# Altium PCB UARC_Sensor.PcbDoc (part 1 of 2)
Units mm, origin at the board's own origin, x right, y up, seen from the top; angles counter-clockwise.
Board outline 60.1 x 84.97 mm, 2 copper layers (Top Layer, Bottom Layer); 85 components, 78 nets, 396 pads, 103 vias.
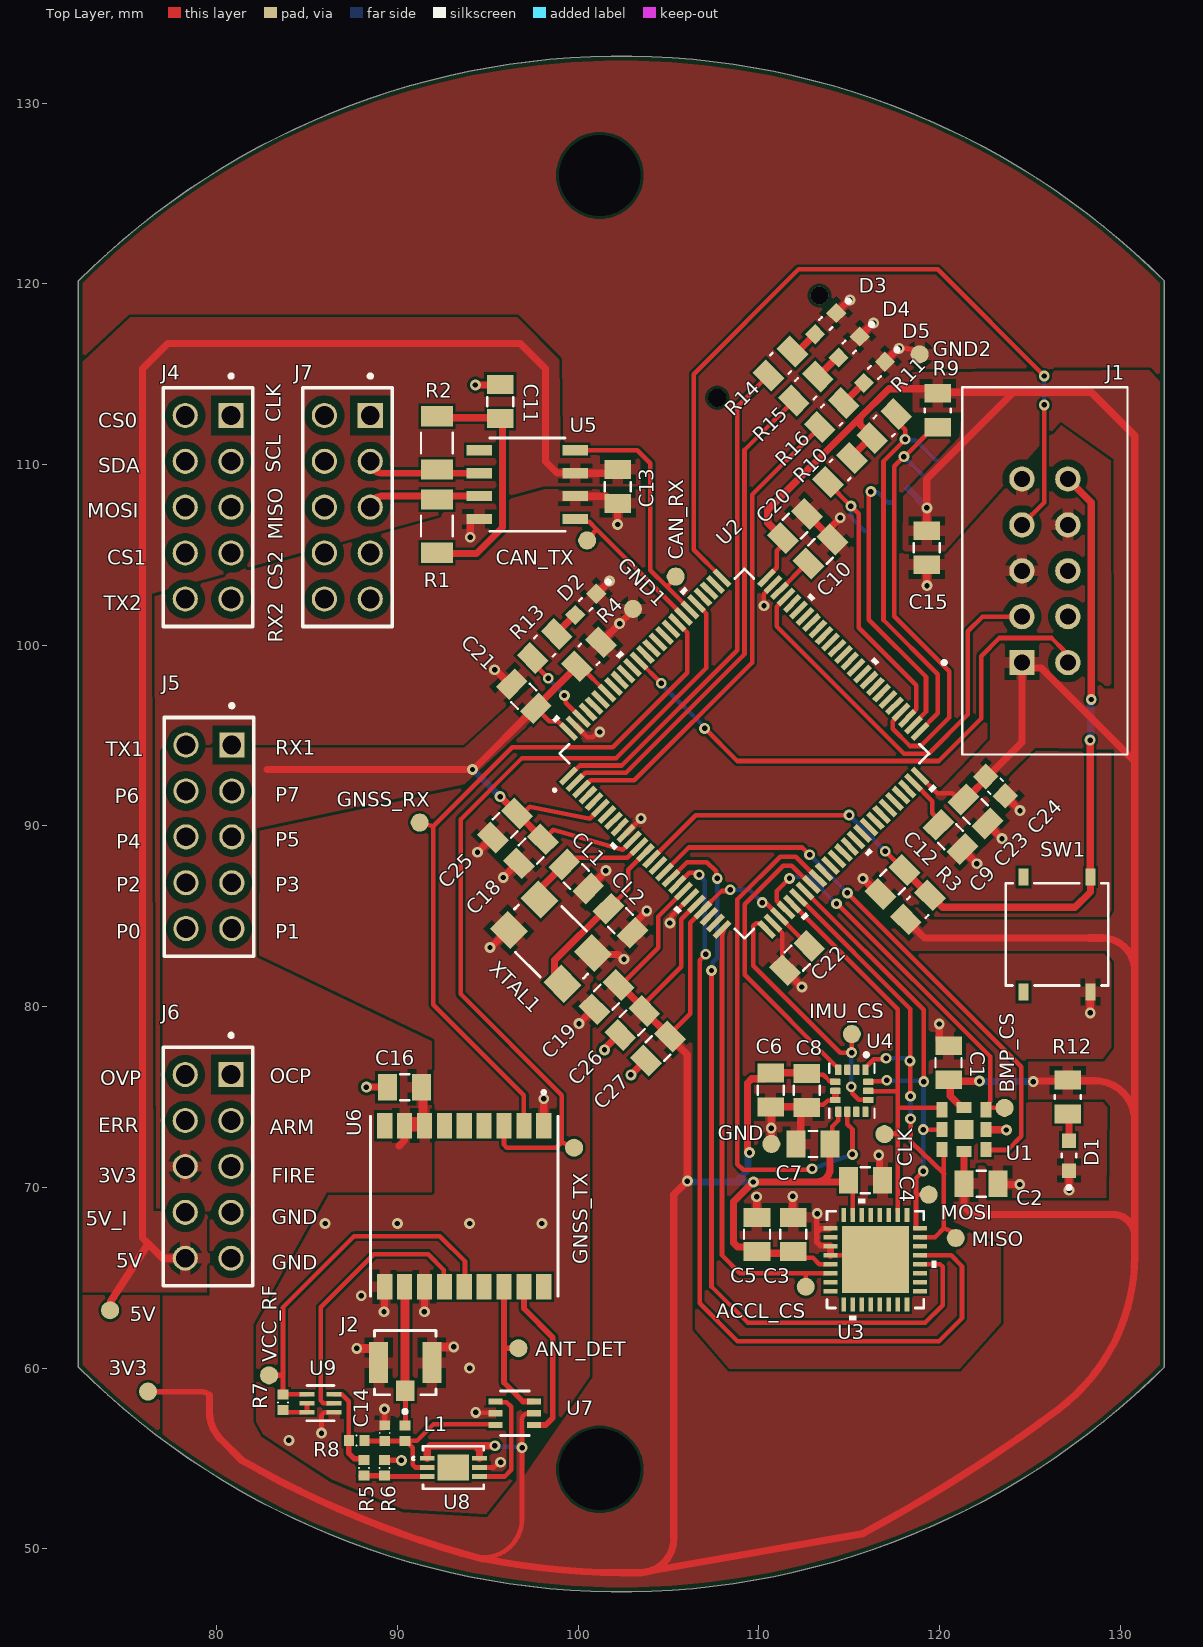
[diagram p0: Top Layer view]
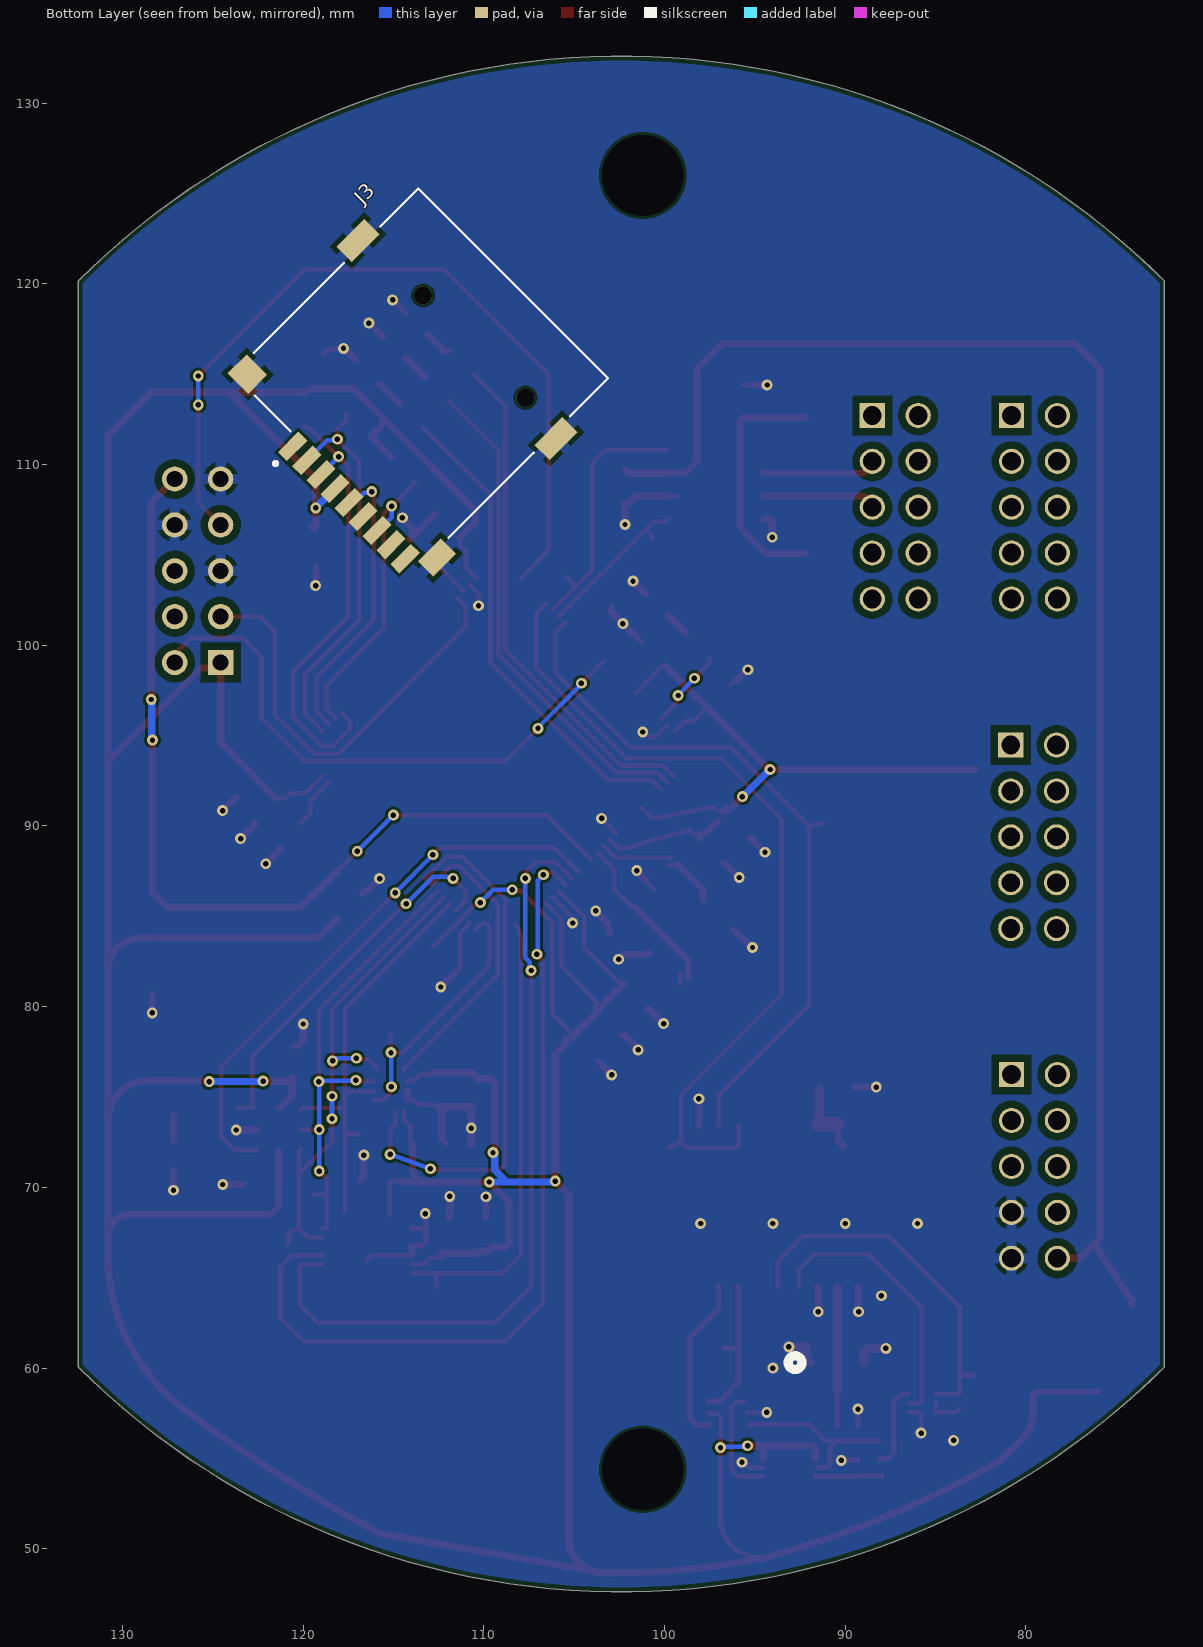
[diagram p1: Bottom Layer view, seen from below]
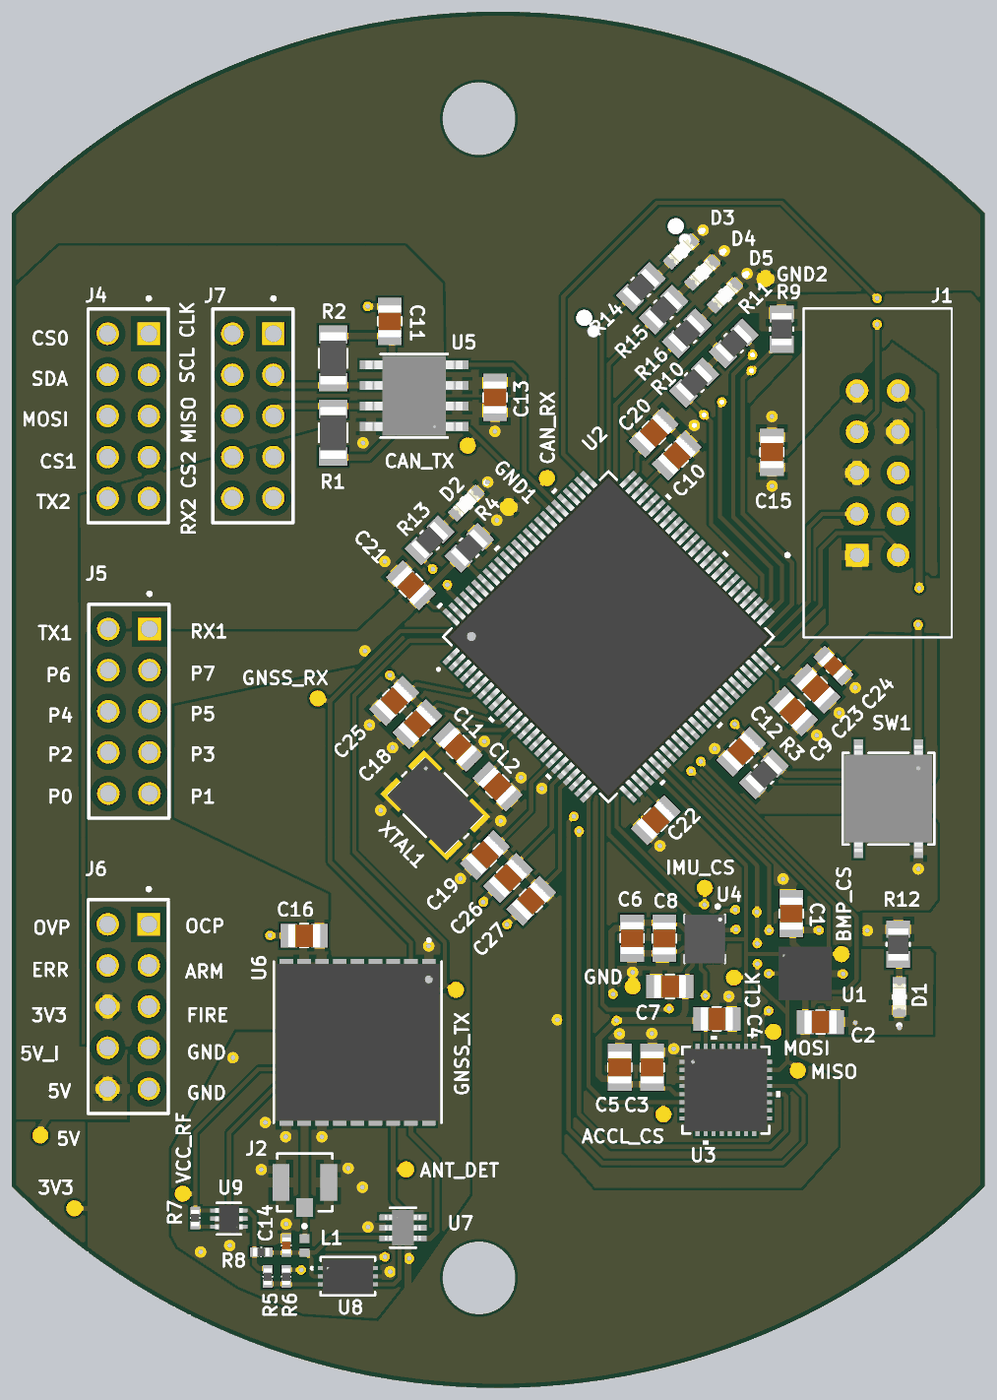
[diagram p2: 3D render of the assembled board from above, using the file's embedded part models]

## Layer stack, top to bottom
Top Solder: solder mask 0.0102, Solder Resist, Dk 3.5
Top Layer: signal copper 0.0356
Dielectric 1: dielectric 0.32, FR-4, Dk 4.8
Bottom Layer: signal copper 0.0356
Bottom Solder: solder mask 0.0102, Solder Resist, Dk 3.5

## Board outline
72.338,60.066 ccw(c102.391,90.118) 132.443,60.066 132.443,120.152 ccw(c102.39,90.1) 72.338,120.152

## Design rules (kind name [scope] priority, off if disabled: settings)
BoardOutlineClearance [All] p1: gap=0.254 ignorepadtopadclearanceinfootprint=FALSE except(0: Arc-SplitContinuation Track-SplitContinuation SMDPad-SplitContinuation THPad-SplitContinuation Via-SplitContinuation Fill-SplitContinuation Poly-SplitContinuation Region-SplitContinuation Text-SplitContinuation)
Clearance [All] p1: gap=0.152 ignorepadtopadclearanceinfootprint=FALSE except(0.4: THPad-Fill THPad-Poly THPad-Region)
HoleSize [All] p1: absolutevalues=TRUE maxlimit=6.2 minlimit=0.3 maxpercent=80.000 minpercent=20.000
MinimumAnnularRing [All] p1: minimumring=0.15
MinimumSolderMaskSliver [All] p1: minsoldermaskwidth=0.1
PolygonConnect ViaConnect [IsVia] p1: connectstyle=Direct reliefconductorwidth=0.254 reliefentries=4 polygonreliefangle="90 Angle" airgapwidth=0.254
PolygonConnect [All] p2: connectstyle=Relief reliefconductorwidth=0.6 reliefentries=4 polygonreliefangle="90 Angle" airgapwidth=0.254
RoutingVias [All] p1: holewidth=0.3 width=0.6 viastyle="Through Hole" minholewidth=0.3 minwidth=0.5 maxholewidth=1 maxwidth=5
SilkToSilkClearance [All] p1: silktosilkclearance=0.1
SilkToSolderMaskClearance [IsPad] p1: minsilkscreentomaskgap=0.1 clearancetoexposedcopper=TRUE
SolderMaskExpansion [All] p1: expansion=0.051 istentingtop=FALSE
Width [All] p1: maxlimit=25.4 minlimit=0.15 preferedwidth=0.3
26 further rules are at their usual default settings.

## Components (designator, comment, footprint, x,y, rotation, side; value= is the part's Value field where it differs from the comment)
3V3 "Test Point" "Test Point Pad Large" 76.2,58.7 r90 top
5V "Test Point" "Test Point Pad Large" 74.1,63.2 r0 top
ACCL_CS "Test Point" "Test Point Pad Large" 112.6,64.5 r90 top
ANT_DET "Test Point" "Test Point Pad Large" 96.7,61.1 r90 top (schematic designator GNSS_ANT_DETECT)
BMP_CS "Test Point" "Test Point Pad Large" 123.6,74.4 r90 top
C1 "100nF" CAPACITOR_0805_2012M-70N 120.5,76.9 r270 top
C2 "100nF" CAPACITOR_0805_2012M-70N 122.3,70.2 r0 top
C3 "100nF" CAPACITOR_0805_2012M-70N 111.9,67.4 r90 top
C4 "100nF" CAPACITOR_0805_2012M-70N 115.9,70.4 r0 top
C5 "10uF" CAPACITOR_0805_2012M-70N 109.9,67.4 r90 top
C6 "10nF" CAPACITOR_0805_2012M-70N 110.664,75.386 r270 top
C7 "100nF" CAPACITOR_0805_2012M-70N 113,72.4 r180 top
C8 "2.2uF" CAPACITOR_0805_2012M-70N 112.652,75.365 r270 top
C9 "2.2uF" CAPACITOR_0805_2012M-70N 120.6,89.4 r315 top
C10 "2.2uF" CAPACITOR_0805_2012M-70N 113.419,105.19 r45 top
C11 "4.7nF" CAPACITOR_0805_2012M-70N 95.69,113.484 r90 top
C12 "100nF" CAPACITOR_0805_2012M-70N 117.4,86.9 r225 top
C13 "100nF" CAPACITOR_0805_2012M-70N 102.19,108.784 r90 top
C14 "10nF" CAPACITOR_0402_1005M_55N 89.3,56.4 r270 top
C15 "100nF" CAPACITOR_0805_2012M-70N 119.3,105.4 r90 top
C16 "100nF" CAPACITOR_0805_2012M-70N 90.4,75.54 r0 top
C18 "100nF" CAPACITOR_0805_2012M-70N 97.4,88.6 r225 top
C19 "100nF" CAPACITOR_0805_2012M-70N 101.573,80.525 r225 top
C20 "100nF" CAPACITOR_0805_2012M-70N 112,106.6 r45 top
C21 "100nF" CAPACITOR_0805_2012M-70N 96.995,97.178 r135 top
C22 "100nF" CAPACITOR_0805_2012M-70N 112.124,82.684 r225 top
C23 "100nF" CAPACITOR_0805_2012M-70N 122,90.8 r315 top
C24 "4.7uF" CAPACITOR_0603_1608M_100N 123.1,92.2 r135 top
C25 "100nF" CAPACITOR_0805_2012M-70N 95.963,90.034 r225 top
C26 "1uF" CAPACITOR_0805_2012M-70N 103,79.1 r225 top
C27 "100nF" CAPACITOR_0805_2012M-70N 104.42,77.689 r225 top
CAN_RX "Test Point" "Test Point Pad Large" 105.4,103.8 r90 top
CAN_TX "Test Point" "Test Point Pad Large" 100.5,105.8 r90 top
CL1 "27pF" CAPACITOR_0805_2012M-70N 99.9,87.2 r315 top
CL2 "27pF" CAPACITOR_0805_2012M-70N 102.342,84.755 r315 top
CLK "Test Point" "Test Point Pad Large" 116.954,72.948 r90 top (schematic designator SPI_CLK)
D1 "SML-D12U1WT86" LED_SML-D12U1WT86 127.165,71.758 r90 top
D2 "SML-D12U1WT86" LED_SML-D12U1WT86 100.42,102.262 r225 top
D3 "SML-D12U1WT86" LED_SML-D12U1WT86 113.7,117.8 r225 top
D4 "SML-D12U1WT86" LED_SML-D12U1WT86 115,116.5 r225 top
D5 "SML-D12U1WT86" LED_SML-D12U1WT86 116.4,115.1 r225 top
GND "Test Point" "Test Point Pad Large" 110.696,72.404 r90 top
GND1 "Test Point" "Test Point Pad Large" 103.039,102.01 r90 top
GND2 "Test Point" "Test Point Pad Large" 118.9,116.1 r90 top
GNSS_RX "Test Point" "Test Point Pad Large" 91.236,90.19 r90 top
GNSS_TX "Test Point" "Test Point Pad Large" 99.776,72.194 r90 top
IMU_CS "Test Point" "Test Point Pad Large" 115.15,78.483 r90 top
J1 "103308-1" TE_103308-1 125.83,104.12 r90 top
J2 "RECE.20279.001E.01" CON3_RECE.20279.001E.01_TAL 90.438,60.303 r0 top
J3 "MSD-1-A" CUI_MSD-1-A 113.5,114.9 r45 bottom
J4 "SSW-105-02-G-D" SAMTEC_SSW-105-02-G-D 80.8,112.72 r90 top locked
J5 "SSW-105-02-G-D" SAMTEC_SSW-105-02-G-D 80.84,94.48 r90 top locked
J6 "SSW-105-02-G-D" SAMTEC_SSW-105-02-G-D 80.8,76.24 r90 top locked
J7 "SSW-105-02-G-D" SAMTEC_SSW-105-02-G-D 88.5,112.72 r90 top locked
L1 "27nH" INDC1005X55N 90.422,56.396 r90 top
MISO "Test Point" "Test Point Pad Large" 120.9,67.2 r90 top
MOSI "Test Point" "Test Point Pad Large" 119.4,69.6 r90 top
R1 "60" RESISTOR_1206_3216M_55N 92.19,106.597 r90 top
R2 "60" RESISTOR_1206_3216M_55N 92.19,111.195 r90 top
R3 "10k" Resistor_0805_2012M-50N 118.8,85.5 r225 top
R4 "10k" Resistor_0805_2012M-50N 100.6,99.5 r225 top
R5 "560" RESISTOR_0402_1005M_37N 88.151,54.482 r90 top
R6 "100k" RESISTOR_0402_1005M_37N 89.286,54.482 r270 top
R7 "100k" RESISTOR_0402_1005M_37N 83.667,58.107 r270 top
R8 "10" RESISTOR_0402_1005M_37N 87.749,55.998 r0 top
R9 "=Value" RESISTOR_0805_2012M-50N 119.9,113 r270 top
R10 "=Value" RESISTOR_0805_2012M-50N 114.5,109.7 r225 top
R11 "=Value" RESISTOR_0805_2012M-50N 116.94,112.129 r45 top
R12 "1k" Resistor_0805_2012M-50N 127.1,75 r90 top
R13 "1k" Resistor_0805_2012M-50N 98.154,99.957 r225 top
R14 "1k" Resistor_0805_2012M-50N 111.2,115.6 r225 top
R15 "1k" Resistor_0805_2012M-50N 112.6,114.2 r225 top
R16 "1k" Resistor_0805_2012M-50N 114.035,112.735 r225 top
SW1 "PTS526 SM15 SMTR2 LFS" "SON4_PTS526 SM15 SMTR2 LFS_CNK" 126.5,84 r270 top
U1 "BMP585" LGA9_BMP585_BOS 121.35,73.2 r0 top
U2 "STM32F407VGT7" LQFP100-14x14mm 109.2,94 r45 top
U3 "ADXL314WBCPZ-RL" LFCSP32_CP-32-17_ADI 116.45,66 r0 top
U4 "ICM-42370-P" PQFN50P250X300X81-14N 115.15,75.34 r270 top
U5 "MCP2557FD-H/SN" SOIC8_SN_MCH 97.19,108.884 r180 top
U6 "MAX-M10M-00B" MOD18_MAX-M10M_UBL 93.7,68.958 r270 top
U7 "NC7WZ07P6X" SC-88SC70-6SOT-363_419B-02_ONS 96.5,57.5 r0 top
U8 "LT6000CDCB#TRPBF" DFN-6_DCB_LIT 93.1,54.5 r0 top
U9 "SI1016X-T1-GE3" SOT_X-T1-GE3_VIS 85.748,58.059 r180 top
VCC_RF "Test Point" "Test Point Pad Large" 82.9,59.6 r90 top
XTAL1 "FY0800018" "4XTAL- 1-3XTAL 2-4NC_DIO" 98.5,83.6 r315 top

## Footprints (in the part's own frame and the unit in brackets; to place one, negate y for a bottom-side part, rotate by r counter-clockwise, add the part's x,y. Pads: shape width x height; smd on the part's side, far side on the other; paste and mask are expansions set on the pad)
"4XTAL- 1-3XTAL 2-4NC_DIO" [mm]
  rect 1.6x1.397 smd paste-0.699 mask+0: 1(-2.1,1.2) 2(2.1,1.2) 3(2.1,-1.2) 4(-2.1,-1.2)
  silkscreen extent -2.71,-1.8 2.71,1.8, body extent -2.58,-1.68 2.58,1.68, height 0.79
CAPACITOR_0402_1005M_55N [mm] "Capacitor, 0402 (1005 metric), 0.55mm height, nominal pads"
  rect 0.54x0.6 smd mask+0.051: 1(-0.432,0) 2(0.432,0)
  silkscreen extent -0.01,-0.28 0.01,0.28, body extent -0.5,-0.28 0.5,0.27, height 0.48
CAPACITOR_0603_1608M_100N [mm] "Capacitor, 0603 (1608 metric), 1mm high, nominal pads"
  rect 1x1.02 smd mask+0.051: 1(-0.759,0) 2(0.759,0)
  silkscreen extent -0.1,-0.5 0.1,0.5, body extent -0.8,-0.5 0.8,0.5, height 0.78
CAPACITOR_0805_2012M-70N [mm] "Capacitor, 0805 (2012 metric), 0.7mm high, nominal pads,"
  rect 1.04x1.47 smd mask+0.051: 1(-0.94,0) 2(0.94,0)
  silkscreen extent -0.25,-0.72 0.25,0.72, body extent -1,-0.73 1,0.73, height 1.23
CON3_RECE.20279.001E.01_TAL [mil]
  rect 41x45 smd paste+0 mask+0: 1(0,-61.02)
  rect 41x89 smd paste+0 mask+0: 2(58.07,0) 3(-58.07,0)
  silkscreen extent -67,-70 67,70
CUI_MSD-1-A [mm]
  rect 0.7x1.6 smd: 1(2.25,7.75) 2(1.15,7.75) 3(0.05,7.75) 4(-1.05,7.75) 5(-2.15,7.75) 6(-3.25,7.75) 7(-4.35,7.75) 8(-5.45,7.75) CD(-6.55,7.75)
  rect 1.2x1.8 smd: G1(-7.75,6.45)
  rect 1.6x1.5 smd: G2(6.85,6.7)
  rect 1.2x2.2 smd: G3(-7.75,-2.85) G4(7.75,-2.85)
  round 1 hole 1 unplated: ""(-4.95,-3.25) ""(3.05,-3.25)
  silkscreen extent -7.42,-7.25 7.42,9.2, body extent -8.28,-6.25 7.87,8.79, height 1.8
DFN-6_DCB_LIT [mil]
  rect 32x10 smd paste+0 mask+0: 1(-57,19.69) 2(-57,0) 3(-57,-19.68) 4(57,-19.68) 5(57,0) 6(57,19.69)
  rect 69x57 smd paste+0 mask+0: 7(0,0)
  silkscreen extent -90,-46 66,46, body extent -61,-41 61,41, height 32
INDC1005X55N [mm]
  rect 0.54x0.6 smd: 1(-0.432,0) 2(0.432,0)
  silkscreen extent 1.1,-0.1 1.3,0.1
LED_SML-D12U1WT86 [mm]
  rect 0.8x0.8 smd: A(0.825,0) C(-0.825,0)
  silkscreen extent -1.86,-0.4 0.11,0.4, body extent -0.8,-0.4 0.8,0.4, height 0.55
LFCSP32_CP-32-17_ADI [mil]
  rect 30x10 smd paste+0 mask+0: 1(-97.5,68.9) 2(-97.5,49.21) 3(-97.5,29.53) 4(-97.5,9.84) 5(-97.5,-9.84) 6(-97.5,-29.53) 7(-97.5,-49.21) 8(-97.5,-68.9) 17(97.5,-68.9) 18(97.5,-49.21) 19(97.5,-29.53) 20(97.5,-9.84) 21(97.5,9.84) 22(97.5,29.53) 23(97.5,49.21) 24(97.5,68.9)
  rect 10x30 smd paste+0 mask+0: 9(-68.9,-97.5) 10(-49.21,-97.5) 11(-29.53,-97.5) 12(-9.84,-97.5) 13(9.84,-97.5) 14(29.53,-97.5) 15(49.21,-97.5) 16(68.9,-97.5) 25(68.9,97.5) 26(49.21,97.5) 27(29.53,97.5) 28(9.84,97.5) 29(-9.84,97.5) 30(-29.53,97.5) 31(-49.21,97.5) 32(-68.9,97.5)
  rect 146x146 smd paste-73 mask+0: 33(0,0)
  silkscreen extent -106,-132 132,132, body extent -101,-101 101,101, height 61
LGA9_BMP585_BOS [mil]
  rect 24x33 smd paste+0 mask+0: 1(-48,43.31) 2(-48,0) 3(-48,-43.31) 5(48,-43.31) 6(48,0) 7(48,43.31)
  rect 33x24 smd paste+0 mask+0: 4(0,-48) 8(0,48)
  rect 42x42 smd paste+0 mask+0: 9(0,0)
  body extent -65,-65 65,65, height 77
LQFP100-14x14mm [mil]
  rect 47x12 smd paste+0 mask+0: 1(-305.12,236.22) 2(-305.12,216.54) 3(-305.12,196.85) 4(-305.12,177.17) 5(-305.12,157.48) 6(-305.12,137.8) 7(-305.12,118.11) 8(-305.12,98.43) 9(-305.12,78.74) 10(-305.12,59.06) 11(-305.12,39.37) 12(-305.12,19.69) 13(-305.12,0) 14(-305.12,-19.69) 15(-305.12,-39.37) 16(-305.12,-59.06) 17(-305.12,-78.74) 18(-305.12,-98.43) 19(-305.12,-118.11) 20(-305.12,-137.8) 21(-305.12,-157.48) 22(-305.12,-177.17) 23(-305.12,-196.85) 24(-305.12,-216.54) 25(-305.12,-236.22) 51(305.12,-236.22) 52(305.12,-216.54) 53(305.12,-196.85) 54(305.12,-177.17) 55(305.12,-157.48) 56(305.12,-137.8) 57(305.12,-118.11) 58(305.12,-98.43) 59(305.12,-78.74) 60(305.12,-59.06) 61(305.12,-39.37) 62(305.12,-19.69) 63(305.12,0) 64(305.12,19.69) 65(305.12,39.37) 66(305.12,59.06) 67(305.12,78.74) 68(305.12,98.43) 69(305.12,118.11) 70(305.12,137.8) 71(305.12,157.48) 72(305.12,177.17) 73(305.12,196.85) 74(305.12,216.54) 75(305.12,236.22)
  rect 12x47 smd paste+0 mask+0: 26(-236.22,-305.12) 27(-216.54,-305.12) 28(-196.85,-305.12) 29(-177.17,-305.12) 30(-157.48,-305.12) 31(-137.8,-305.12) 32(-118.11,-305.12) 33(-98.43,-305.12) 34(-78.74,-305.12) 35(-59.06,-305.12) 36(-39.37,-305.12) 37(-19.69,-305.12) 38(0,-305.12) 39(19.69,-305.12) 40(39.37,-305.12) 41(59.06,-305.12) 42(78.74,-305.12) 43(98.43,-305.12) 44(118.11,-305.12) 45(137.8,-305.12) 46(157.48,-305.12) 47(177.17,-305.12) 48(196.85,-305.12) 49(216.54,-305.12) 50(236.22,-305.12) 76(236.22,305.12) 77(216.54,305.12) 78(196.85,305.12) 79(177.17,305.12) 80(157.48,305.12) 81(137.8,305.12) 82(118.11,305.12) 83(98.43,305.12) 84(78.74,305.12) 85(59.06,305.12) 86(39.37,305.12) 87(19.69,305.12) 88(0,305.12) 89(-19.69,305.12) 90(-39.37,305.12) 91(-59.06,305.12) 92(-78.74,305.12) 93(-98.43,305.12) 94(-118.11,305.12) 95(-137.8,305.12) 96(-157.48,305.12) 97(-177.17,305.12) 98(-196.85,305.12) 99(-216.54,305.12) 100(-236.22,305.12)
  silkscreen extent -351,-349 349,349, body extent -315,-315 315,315, height 63
MOD18_MAX-M10M_UBL [mil]
  rect 55x33 smd paste+0 mask+0: 1(-175.5,173.23) 2(-175.5,129.92) 3(-175.5,86.61) 4(-175.5,43.31) 5(-175.5,0) 6(-175.5,-43.31) 7(-175.5,-86.61) 8(-175.5,-129.92) 9(-175.5,-173.23) 10(175.5,-173.23) 11(175.5,-129.92) 12(175.5,-86.61) 13(175.5,-43.31) 14(175.5,0) 15(175.5,43.31) 16(175.5,86.61) 17(175.5,129.92) 18(175.5,173.23)
  silkscreen extent -252,-204 196,204, body extent -191,-199 191,199, height 106
PQFN50P250X300X81-14N [mm]
  rrect14% 0.58x0.35 smd mask+0: 1(-1.16,0.75)
  rrect25% 0.58x0.35 smd mask+0: 2(-1.16,0.25) 3(-1.16,-0.25) 4(-1.16,-0.75) 8(1.16,-0.75) 9(1.16,-0.25) 10(1.16,0.25) 11(1.16,0.75)
  rrect25% 0.35x0.58 smd mask+0: 5(-0.5,-0.91) 6(0,-0.91) 7(0.5,-0.91) 12(0.5,0.91) 13(0,0.91) 14(-0.5,0.91)
  silkscreen extent -2.1,-1.25 1.5,1.25, body extent -1.5,-1.25 1.5,1.25, height 0.81
RESISTOR_0402_1005M_37N [mm] "Resistor, 0402 (1005 metric), 0.37mm height, nominal pads"
  rect 0.54x0.6 smd mask+0.051: 1(-0.432,0) 2(0.432,0)
  silkscreen extent -0.01,-0.28 0.01,0.28, body extent -0.5,-0.25 0.5,0.25, height 0.37
Resistor_0805_2012M-50N [mm] "Resistor, 0805 (2012 metric), nominal pads"
  rect 1.04x1.47 smd mask+0.051: 1(-0.94,0) 2(0.94,0)
  silkscreen extent -0.1,-0.72 0.1,0.72, body extent -1,-0.63 1,0.62, height 0.5
RESISTOR_0805_2012M-50N [mm] "Resistor, 0805 (2012 metric), nominal pads"
  rect 1.04x1.47 smd mask+0.051: 1(-0.94,0) 2(0.94,0)
  silkscreen extent -0.1,-0.72 0.1,0.72, body extent -1,-0.63 1,0.62, height 0.5
RESISTOR_1206_3216M_55N [mm]
  rect 1.13x1.77 smd mask+0.051: 1(-1.47,0) 2(1.47,0)
  silkscreen extent -0.58,-0.88 0.58,0.88, body extent -1.6,-0.8 1.6,0.8, height 0.65
SAMTEC_SSW-105-02-G-D [mm]
  rect 1.39x1.39 hole 1.04: 01(0,0)
  round 1.39 hole 1.04: 02(0,2.54) 03(-2.54,0) 04(-2.54,2.54) 05(-5.08,0) 06(-5.08,2.54) 07(-7.62,0) 08(-7.62,2.54) 09(-10.16,0) 10(-10.16,2.54)
  silkscreen extent -11.69,-1.21 2.27,3.75
SC-88SC70-6SOT-363_419B-02_ONS [mil]
  rect 31x14 smd paste+0 mask+0: 1(-42,25.59) 2(-42,0) 3(-42,-25.59) 4(42,-25.59) 5(42,0) 6(42,25.59)
  silkscreen extent -32,-48 32,48, body extent -44,-44 44,44, height 43
SOIC8_SN_MCH [mil]
  rect 55x22 smd paste+0 mask+0: 1(-104.5,75) 2(-104.5,25) 3(-104.5,-25) 4(-104.5,-75) 5(104.5,-75) 6(104.5,-25) 7(104.5,25) 8(104.5,75)
  silkscreen extent -82,-102 82,102, body extent -118,-96 118,96, height 69
"SON4_PTS526 SM15 SMTR2 LFS_CNK" [mm]
  rect 0.95x0.559 smd paste+0 mask+0: 1(-3.18,1.85) 2(-3.18,-1.85) 3(3.18,-1.85) 4(3.18,1.85)
  silkscreen extent -2.83,-2.83 2.83,2.83, body extent -3.3,-2.71 3.3,2.71, height 1.6
SOT_X-T1-GE3_VIS [mil]
  rect 32x10 smd paste+0 mask+0: 1(-29.5,19.69) 2(-29.5,0) 3(-29.5,-19.69) 4(29.5,-19.69) 5(29.5,0) 6(29.5,19.69)
  silkscreen extent -30,-39 30,39, body extent -34,-34 34,34, height 24
TE_103308-1 [mil]
  rect 55x55 hole 35: 1(-200,50)
  round 55 hole 35: 2(-100,50) 3(0,50) 4(100,50) 5(200,50) 6(-200,-50) 7(-100,-50) 8(0,-50) 9(100,-50) 10(200,-50)
  silkscreen extent -400,-180 400,223
"Test Point Pad Large" [mm] "Exposed copper pad, 1mm dia. Very easy to probe."
  round 1 smd paste-10 mask+0.051: 1(0,0)

## Part data
C1 C2 C3 C4 C7 C12 C15 C16 C18 C19 C20 C21 C22 C23 C25 C27: library part GRM21BR61E226ME44L, "CUSTOM: 885012207016 0.1µF 0805 ±10% 10V X7R Ceramic Capacitor", Capacitance at Rated Voltage=10%, Package=0805, Rated Voltage=25V, Supplier 1 Part No.=490-GRM155R61J224KE01JCT-ND, Temp Range="-55°C ~ 85°C", Temperature Coefficient=X5R, Tolerance=±20%, APSS Standard Part="APSS Standard", MF Part No.=GRM21BR61E226ME44L, Supplier 1=Digikey
C5: library part GRM21BR61E226ME44L, "CUSTOM: TACR106K010XTA 10µF 0805 ±10% 10V Tantalum Capacitor", Capacitance at Rated Voltage=10%, Package=0805, Rated Voltage=25V, Supplier 1 Part No.=490-GRM155R61J224KE01JCT-ND, Temp Range="-55°C ~ 85°C", Temperature Coefficient=X5R, Tolerance=±20%, APSS Standard Part="APSS Standard", MF Part No.=GRM21BR61E226ME44L, Supplier 1=Digikey
C6: library part GRM21BR61E226ME44L, "CUSTOM: 885012207011, 10000pF 0805 ±10% 10 X7R  Ceramic Capacitor", Capacitance at Rated Voltage=10%, Package=0805, Rated Voltage=25V, Supplier 1 Part No.=490-GRM155R61J224KE01JCT-ND, Temp Range="-55°C ~ 85°C", Temperature Coefficient=X5R, Tolerance=±20%, APSS Standard Part="APSS Standard", MF Part No.=GRM21BR61E226ME44L, Supplier 1=Digikey
C8 C9 C10: library part GRM21BR61E226ME44L, "CUSTOM: GRM21BR71A225KA01L 2.2µF 0805 ±10% 10V X7R Ceramic Capacitor", Capacitance at Rated Voltage=10%, Package=0805, Rated Voltage=25V, Supplier 1 Part No.=490-GRM155R61J224KE01JCT-ND, Temp Range="-55°C ~ 85°C", Temperature Coefficient=X5R, Tolerance=±20%, APSS Standard Part="APSS Standard", MF Part No.=GRM21BR61E226ME44L, Supplier 1=Digikey
C11: library part GRM21BR61E226ME44L, "CUSTOM: CC0805KRX7R9BB472 4700pF 0805 ±10% 50V X7R Ceramic Capacitor", Capacitance at Rated Voltage=10%, Package=0805, Rated Voltage=25V, Supplier 1 Part No.=490-GRM155R61J224KE01JCT-ND, Temp Range="-55°C ~ 85°C", Temperature Coefficient=X5R, Tolerance=±20%, APSS Standard Part="APSS Standard", MF Part No.=GRM21BR61E226ME44L, Supplier 1=Digikey
C13: library part GRM21BR60J107ME15L, "CUSTOM: 885012207016 0.1µF 0805 ±10% 10V X7R Ceramic Capacitor", Capacitance at Rated Voltage=20%, Package=0805, Rated Voltage=6.3V, Supplier 1 Part No.=490-GRM155R61E225KE11JCT-ND, Temp Range="-55°C ~ 85°C", Temperature Coefficient=X5R, Tolerance=±20%, APSS Standard Part="APSS Standard", MF Part No.=GRM21BR60J107ME15L, Supplier 1=Digikey
C14: library part GRM155R61E225KE11J, "CUSTOM: GRM155R71C103KA01D, 10000pF 0402 ±10% 16V X7R Ceramic Capacitor", Capacitance at Rated Voltage=10%, Package=0402, Rated Voltage=25V, Supplier 1 Part No.=490-10749-1-ND, Temp Range="-55°C ~ 85°C", Temperature Coefficient=X5R, Tolerance=±10%, APSS Standard Part="APSS Standard", MF Part No.=GRM155R61E225KE11J, Supplier 1=Digikey
C24: library part GRM188Z71A106KA73D, "CUSTOM:  GRM188Z71A475KE15D 4.7µF 0603 ±10% 10V X7R Ceramic Capacitor", Capacitance at Rated Voltage=20%, Package=0603, Rated Voltage=10V, Supplier 1 Part No.=490-5313-1-ND, Temp Range="-55°C ~ 125°C", Temperature Coefficient=X7R, Tolerance=±10%, APSS Standard Part="APSS Standard", MF Part No.=GRM188Z71A106KA73D, Supplier 1=Digikey
C26: library part GRM21BR61E226ME44L, "CUSTOM: 0805ZC105KAT2A 1µF 0805 ±10% 10V X7R  Ceramic Capacitor", Capacitance at Rated Voltage=10%, Package=0805, Rated Voltage=25V, Supplier 1 Part No.=490-GRM155R61J224KE01JCT-ND, Temp Range="-55°C ~ 85°C", Temperature Coefficient=X5R, Tolerance=±20%, APSS Standard Part="APSS Standard", MF Part No.=GRM21BR61E226ME44L, Supplier 1=Digikey
CL1 CL2: library part GRM21BR61E226ME44L, "CUSTOM: 600F270JT250XT4K 27pF 0805 ±5% 250V C0G, NP0 Ceramic Capacitor", Capacitance at Rated Voltage=10%, Package=0805, Rated Voltage=25V, Supplier 1 Part No.=490-GRM155R61J224KE01JCT-ND, Temp Range="-55°C ~ 85°C", Temperature Coefficient=X5R, Tolerance=±20%, APSS Standard Part="APSS Standard", MF Part No.=GRM21BR61E226ME44L, Supplier 1=Digikey
D1 D2 D3 D4 D5: "Red 620nm LED Indication - Discrete 2.2V 0603 (1608 Metric)", Package="0603 Rohm", Availability="In Stock", Check_prices=https://www.snapeda.com/parts/SML-D12U1WT86/Rohm/view-part/?ref=eda, MF=Rohm, MP=SML-D12U1WT86, Price=None, Purchase-URL=https://pricing.snapeda.com/search?q=SML-D12U1WT86&ref=eda, SnapEDA_Link=https://www.snapeda.com/parts/SML-D12U1WT86/Rohm/view-part/?ref=snap
J1: "Header;  Pin;  Vertical;  Copper Alloy;  Thermoplastic;  10;  0.100 x 0.100 in.;  1 A", Package=None, Availability=Unavailable, MF="TE Connectivity", MP=103308-1, Price=None, SnapEDA_Link=https://www.snapeda.com/parts/103308-1/TE%20Connectivity%20AMP%20Connectors/view-part/519501/?ref=snap
J2: "No Description Available", Manufacturer_Name="Taoglas Limited", Copyright="Copyright (C) 2025 Ultra Librarian. All rights reserved.", Digi-Key_Part_Number_1=931-1107-1-ND, Digi-Key_Part_Number_2=931-1107-6-ND, Digi-Key_Part_Number_3=931-1107-2-ND, Manufacturer_Part_Number=RECE.20279.001E.01, RefDes=RefDes, Type="Coaxial Connectors(RF) Assemblies"
J3: "Micro SD Card Connector, 9 Positions, Connector and Ejector, Push In, Auto Eject Out, Surface Mount, 1.8 mm Height Above Board, Gold Flash", Package=None, Check_prices=https://www.snapeda.com/parts/MSD-1-A/Same+Sky/view-part/?ref=eda, MF="Same Sky", MP=MSD-1-A, SnapEDA_Link=https://www.snapeda.com/parts/MSD-1-A/Same+Sky/view-part/?ref=snap
J4 J5 J6 J7: Package=None, Availability=Unavailable, MF="Samtec Inc.", MP=SSW-105-02-G-D, Price=None
L1: library part LQG15HH27NJ02D, "LQG15HN2N2S02D 27nH 0402  Unshielded Multilayer Inductor 350 mA 460mOhm Max", Package=None, Availability=Unavailable, MP=LQG15HH27NJ02D, Price=None
R1 R2: library part "TNPW1206xxxxDE Series", "CUSTOM: CRCW120660R0KNEAIF 60 Ohms 1206  ±10% 0.25W, 1/4W Chip Resistor,", Package=0805, Power=0.52W, Rated Voltage=200V, Temp Range="-55°C ~ 155°C", Temperature Coefficient=±200ppm/°C, Tolerance=0.5%, Value Range="1R ~ 2M", E Series=E24+E96, Supplier 1=Digikey
R3 R4: library part "RMCF0805JT Series", "CUSTOM: CRCW080510K0FKEA 10 kOhms 0805  ±1% 0.25W, 1/4W Chip Resistor", Package=0805, Power=1/8W, Rated Voltage=150V, Temp Range="-55°C ~ 155°C", Temperature Coefficient=±200ppm/°C, Tolerance=5%, Value Range="100m ~ 22M", APSS Standard Part="APSS Standard", E Series=E24, Supplier 1=Digikey
R5: library part "RMCF0402JT Series", "CUSTOM: ERJ-2GEJ561X 560 Ohms 0402  ±5% 0.1W, 1/10W Chip Resistor", Package=0402, Power=1/16W, Rated Voltage=50V, Temp Range="-55°C ~ 155°C", Temperature Coefficient=±100ppm/°C, Tolerance=5%, Value Range="1 ~ 20M", APSS Standard Part="APSS Standard", E Series=E24, Supplier 1=Digikey
R6 R7: library part "RMCF0402JT Series", "CUSTOM: RK73B1ETTP104J 100 kOhms 0402 ±5% 0.1W, 1/10W Chip Resistor", Package=0402, Power=1/16W, Rated Voltage=50V, Temp Range="-55°C ~ 155°C", Temperature Coefficient=±100ppm/°C, Tolerance=5%, Value Range="1 ~ 20M", APSS Standard Part="APSS Standard", E Series=E24, Supplier 1=Digikey
R8: library part "RMCF0402JT Series", "CUSTOM: SG73P1EWTTP100J 10 Ohms 0402 ±5% 0.25W, 1/4W Chip Resistor", Package=0402, Power=1/16W, Rated Voltage=50V, Temp Range="-55°C ~ 155°C", Temperature Coefficient=±100ppm/°C, Tolerance=5%, Value Range="1 ~ 20M", APSS Standard Part="APSS Standard", E Series=E24, Supplier 1=Digikey
R9 R10 R11: library part "Generic Resistor", "CUSTOM: CRCW080510K0FKEA 10 kOhms 0805  ±1% 0.25W, 1/4W Chip Resistor", Tolerance=?%
R12 R13 R14 R15 R16: library part "RMCF0805JT Series", "CUSTOM: CRCW08051K00FKEA 1 kOhms 0805 ±1% 0.25W, 1/4W Chip Resistor", Package=0805, Power=1/8W, Rated Voltage=150V, Temp Range="-55°C ~ 155°C", Temperature Coefficient=±200ppm/°C, Tolerance=5%, Value Range="100m ~ 22M", APSS Standard Part="APSS Standard", E Series=E24, Supplier 1=Digikey
SW1: "Description", Manufacturer_Name="C&K Components", Copyright="Copyright (C) 2025 Ultra Librarian. All rights reserved.", Manufacturer_Part_Number="PTS526 SM15 SMTR2 LFS", RefDes=RefDes, Type=Type
U1: "No Description Available", Manufacturer_Name="Bosch Sensortec", Copyright="Copyright (C) 2025 Ultra Librarian. All rights reserved.", Digi-Key_Part_Number_1=828-BMP585TR-ND, Digi-Key_Part_Number_2=828-BMP585CT-ND, Digi-Key_Part_Number_3=828-BMP585DKR-ND, Manufacturer_Part_Number=BMP585, RefDes=RefDes, Type="Pressure Sensors, Transducers"
U2: "High-performance foundation line, Arm Cortex-M4 core with DSP and FPU, 1 Mbyte of Flash memory, 168 MHz CPU, ART Accelerator, Ethernet, FSMC", Manufacturer_Name=STMicroelectronics, Copyright="Copyright (C) 2025 Ultra Librarian. All rights reserved.", Manufacturer_Part_Number=STM32F407VGT7, RefDes=RefDes, Type=Type
U3: "Â±200 g Range, 3-Axis Digital Accelerometer", Manufacturer_Name="Analog Devices Inc", Copyright="Copyright (C) 2025 Ultra Librarian. All rights reserved.", Manufacturer_Part_Number=ADXL314WBCPZ-RL, RefDes=RefDes, Type=Type
U4: "Accelerometer X, Y, Z Axis 2g, 4g, 8g, 16g 14-LGA (2.5x3)", Package=None, Check_prices=https://www.snapeda.com/parts/ICM-42370-P/InvenSense/view-part/?ref=eda, MF=InvenSense, MP=ICM-42370-P, SnapEDA_Link=https://www.snapeda.com/parts/ICM-42370-P/InvenSense/view-part/?ref=snap
U5: library part MCP2557FD-HSN, "No Description Available", Manufacturer_Name=Microchip, Copyright="Copyright (C) 2025 Ultra Librarian. All rights reserved.", Digi-Key_Part_Number_1=MCP2557FD-H/SN-ND, Manufacturer_Part_Number=MCP2557FD-H/SN, RefDes=RefDes, Type=Type
U6: "No Description Available", Manufacturer_Name=Ublox, Copyright="Copyright (C) 2025 Ultra Librarian. All rights reserved.", Digi-Key_Part_Number_1=672-MAX-M10M-00BTR-ND, Digi-Key_Part_Number_2=672-MAX-M10M-00BCT-ND, Digi-Key_Part_Number_3=672-MAX-M10M-00BDKR-ND, Manufacturer_Part_Number=MAX-M10M-00B, RefDes=RefDes, Type=RF
U7: "Description", Manufacturer_Name=onsemi, Copyright="Copyright (C) 2025 Ultra Librarian. All rights reserved.", Manufacturer_Part_Number=NC7WZ07P6X, RefDes=RefDes, Type=Type
U8: library part LT6000CDCBTRPBF, "Single 1.8V, 13ÂµA Precision Rail-to-Rail Op Amp", Manufacturer_Name="Analog Devices Inc", Copyright="Copyright (C) 2025 Ultra Librarian. All rights reserved.", Datasheet=https://www.analog.com/media/en/technical-documentation/data-sheets/600012fa.pdf, Digi-Key_Part_Number_1=505-LT6000CDCB#TRPBFCT-ND, Digi-Key_Part_Number_2=505-LT6000CDCB#TRPBFDKR-ND, Digi-Key_Part_Number_3=505-LT6000CDCB#TRPBFTR-ND, Digi-Key_Part_Number_4=LT6000CDCB#TRPBF-ND, Manufacturer_Part_Number=LT6000CDCB#TRPBF, RefDes=RefDes, Type=Type
U9: "COMPLEMENTARY N & P-CH 20-V (D-S) MOSFET", Manufacturer_Name=Vishay, Copyright="Copyright (C) 2025 Ultra Librarian. All rights reserved.", Datasheet=https://www.vishay.com/doc?71168, Digi-Key_Part_Number_1=SI1016X-T1-GE3TR-ND, Digi-Key_Part_Number_2=SI1016X-T1-GE3CT-ND, Digi-Key_Part_Number_3=SI1016X-T1-GE3DKR-ND, Manufacturer_Part_Number=SI1016X-T1-GE3, RefDes=RefDes, Type=Type
XTAL1: "No Description Available", Manufacturer_Name="Diodes Inc", Copyright="Copyright (C) 2025 Ultra Librarian. All rights reserved.", Manufacturer_Part_Number=FY0800018, RefDes=RefDes, Type=Type

## Free pads (board coordinates)
  round 0 hole 4.5 unplated: 1(101.2,54.4) 1(101.2,126)

## Via types
v1: diameter 0.6, hole 0.3, Top Layer to Bottom Layer, 103 vias

## Nets (pads, with @x,y where several pads share a name; then routed paths per layer and width w, separated by ;. In a path a pad name is that pad's centre, name@x,y a point inside that pad or via, vN(x,y) a via of type N, cw(c..) or ccw(c..) an arc to the next point about the centre after c; other vN are vias at no path point)
5V: 5V.1 C13.2 J6.10 U5.3 | length 87.9
  Top Layer w0.4: 5V.1@74.147,63.497 74.139,63.538 74.139,63.58 74.139,63.699 76.214,66.886 ; J6.10 77.02,66.08 76.214,66.886 ; C13.2 101.985,109.519 U5.3 99.826,109.538 98.836,109.538 98.2,110.174 98.2,115.3 96.8,116.7 77.3,116.7 75.9,115.3 75.9,67.2 76.214,66.886
5V_ISO: J6.08
ACCL_CS: ACCL_CS.1 U2.25 U3.6 | length 25.6
  Top Layer w0.254: U2.25@108.302,84.588 108.231,84.509 ccw(c109.12,83.769) 107.963,83.769 107.963,83.349 107.963,66.237 108.95,65.25 112.6,65.25 ; ACCL_CS.1 112.6,65.25 ; U3.6 112.6,65.25
ACCL_INT1: U2.17 U3.20 | length 43.7
  Top Layer w0.254: U2.17 106.028,88 107.131,88 107.638,87.493 107.638,87.19 v1@107.714,87.114 ; v1(107.382,82) 107.382,64.518 109.4,62.5 119.2,62.5 120.178,63.478 120.178,65.601 120.029,65.75 U3.20
  Bottom Layer w0.254: v1(107.382,82) 107.448,82.066 107.448,82.464 107.7,82.716 v1(107.7,87.1)
ACCL_INT2: U2.18 U3.21 | length 46.9
  Top Layer w0.254: U2.18 106.145,87.41 106.497,87.41 106.606,87.3 v1(106.7,87.3) ; v1(107.062,82.9) 106.735,82.573 106.735,63.58 108.821,61.494 119.974,61.494 121.247,62.768 121.247,65.645 120.642,66.25 U3.21
  Bottom Layer w0.254: v1(106.7,87.3) 106.7,87.286 107.008,86.978 107.008,82.954 v1(107.062,82.9)
ANT_DETECT: ANT_DET.1 U6.16 U7.6 | length 8.2
  Top Layer w0.3: 95.898,61.1 ANT_DET.1
  Top Layer w0.32: U6.16@95.898,64.498 95.898,61.1 95.898,59.204 96.945,58.157 U7.6@97.559,58.157
ANT_OFF_N: U6.13 U9.2 | length 15.3
  Top Layer w0.254: U9.2 85.906,58.059 85.757,58.208 85.757,63.357 88.7,66.3 91.7,66.3 92.569,65.431 92.569,64.531 U6.13
ANT_SHORT_N: U6.17 U7.4 | length 9.1
  Top Layer w0.32: U6.17 97,63.3 98.6,61.7 98.6,57.237 98.215,56.852 U7.4@97.568,56.852
ANT_SIGNAL: J2.1 L1.2 U6.11 | length 7.7
  Top Layer w0.254: U6.11@90.396,64.496 U6.11 ; J2.1 J2.1@90.448,58.743
  Top Layer w0.3: L1.2@90.448,56.81 J2.1@90.448,58.743
  Top Layer w0.5: J2.1@90.434,58.756 U6.11@90.434,64.466
ARM: J6.03
BMP_CS: BMP_CS.1 U1.7 U2.29 | length 21.2
  Top Layer w0.254: U2.29 111.498,85.374 111,85.872 111,86.4 v1(111.7,87.1) ; v1(114.3,85.7) 114.344,85.7 122.8,77.244 122.8,74.741 122.747,74.688 122.747,74.478 ccw(c122.825,74.478) 122.825,74.4 BMP_CS.1
  Bottom Layer w0.254: v1(111.7,87.1) 111.766,87.166 111.988,87.166 112.022,87.2 112.8,87.2 v1(114.3,85.7)
BMP_INT: U1.5 U2.16 | length 31.5
  Top Layer w0.254: U2.16 106.131,88.81 112.414,88.81 v1(112.812,88.411) ; v1(114.9,86.3) 124.526,76.674 124.526,72.826 123.768,72.068 122.602,72.068 U1.5
  Bottom Layer w0.254: v1(112.812,88.411) 112.812,88.4 114.9,86.312 v1(114.9,86.3)
CAN_H: J7.05 R1.2 U5.7 | length 6.4
  Top Layer w0.381: J7.05 cw(c89.109,107.64) 89.109,108.249 U5.7
CAN_L: J7.03 R2.1 U5.6 | length 6.4
  Top Layer w0.381: J7.03 ccw(c89.161,110.18) 89.161,109.519 U5.6
CAN_LED: R16.2 U2.3 | length 26.9
  Top Layer w0.254: U2.3@100.195,92.055 100.22,92.055 100.695,92.53 103.117,92.53 109.627,99.039 109.627,108.327 R16.2@113.344,112.044
CAN_RX: CAN_RX.1 U2.81 U5.4 | length 14.2
  Top Layer w0.254: U5.4 103.285,110.789 104,110.074 104,104.15 104.925,103.225 ; CAN_RX.1 104.925,103.225 ; U2.81 104.925,103.225
CAN_TX: CAN_TX.1 U2.82 U5.1 | length 8.9
  Top Layer w0.254: U5.1 99.997,106.827 100.616,106.827 101.021,106.421 ; CAN_TX.1@100.719,105.876 100.705,106.044 101.021,106.421 ; U2.82 101.021,106.421
CLK: J4.01
CS0: J4.02
CS1: J4.08
CS2: J4.07
ERR: J6.04
ERROR_LED: R14.2 U2.1 | length 28.1
  Top Layer w0.254: U2.1 99.513,92.763 100.097,93.346 102.412,93.346 108.8,99.734 108.8,113.2 R14.2
FIRE: J6.05
GND: C1.1 C2.2 C3.2 C4.2 C5.2 C6.2 C7.2 C8.2 C9.2 C10.2 C11.2 C12.2 C13.1 C14.1 C15.1 C16.1 C18.2 C19.2 C20.2 C21.2 C22.2 C23.2 C24.1 C25.2 C26.2 C27.2 CL1.2 CL2.2 D1.C D2.C D3.C D4.C D5.C GND1.1 GND2.1 GND.1 J1.3 J1.5 J1.9 J2.2 J2.3 J3.6 J3.G1 J3.G2 J3.G3 J3.G4 J6.07 J6.09 R4.1 R6.1 SW1.4 U1.6 U2.10 U2.20 U2.27 U2.74 U2.99 U3.1 U3.3 U3.4 U3.33 U4.6 U4.7 U5.2 U5.8 U6.1 U6.10 U6.12 U7.2 U8.5 U9.1 XTAL1.2 XTAL1.4 | length 88.6
  Top Layer w0.254: v1(85.8,56.4) 85.8,57.4 85.959,57.559 U9.1 ; R6.1 R6.1@89.293,54.921 ; U6.10 U6.10@89.314,64.486 ; U6.12 U6.12@91.513,64.487 ; v1(94.341,57.546) 94.364,57.523 95.41,57.523 U7.2 ; U8.5 95.335,54.5 95.622,54.786 v1(95.712,54.786) ; C11.2@95.082,114.4 C11.2 ; C25.2@95.249,89.349 cw(c95.299,89.3) C25.2 ; C21.2@96.003,98.071 C21.2 ; U6.1@98.096,73.419 U6.1 ; U5.2@99.273,108.271 U5.2 ; U2.99 100.522,94.9 100.806,94.9 101.106,95.2 v1(101.2,95.2) ; CL1.2 CL1.2@101.021,86.939 ; D2.C D2.C@101.038,102.845 ; R4.1 R4.1@101.543,100.443 ; C13.1 C13.1@102.2,107.844 ; U2.10 102.659,89.593 v1(103.482,90.416) ; GND1.1@102.916,102.018 GND1.1@102.925,102.15 ; GND1.1@102.978,101.878 GND1.1@102.978,101.908 ; C27.2@103.432,76.791 C27.2 ; v1(105.082,84.629) 105.148,84.695 105.148,84.998 U2.20 ; v1(110.29,102.187) 110.265,102.212 110.265,102.818 110.791,103.344 U2.74 ; C6.2 C6.2@110.689,74.053 ; U2.27 110.791,84.595 111.307,84.079 111.307,82.171 C22.2 C22.2@111.459,82.012 ; C7.2 C7.2@112.32,72.66 ; C8.2@112.363,74.136 C8.2 C8.2@112.497,74.425 ; C8.2@112.6,74.46 112.707,74.567 113.567,74.567 113.805,74.805 114.205,74.805 ccw(c114.12,74.89) U4.7@114.24,74.89 ; U3.4 116.2,66.25 U3.33 ; D3.C D3.C@114.471,118.582 ; C4.2@116.8,70.44 C4.2 ; D5.C D5.C@117.176,115.876 ; C15.1@119.29,104.067 C15.1 ; C2.2 ccw(c123.35,70.31) C2.2@123.35,70.154 ; SW1.4@128.336,80.471 SW1.4
  Top Layer w0.3: v1(89.289,57.729) 89.295,57.724 89.295,56.838 C14.1@89.3,56.832 ; R6.1@89.293,54.921 89.311,54.904 90.21,54.904 v1(90.221,54.893) ; v1(113.235,68.549) 113.2,68.514 113.2,67.5 ; U3.3 113.951,66.773 113.403,66.773 113.2,66.976 113.2,67.5 ; U3.1 113.951,67.727 113.427,67.727 113.2,67.5 ; v1(117.763,116.429) 118.107,116.429 cw(c118.107,115.307) GND2.1 ; C2.2@123.35,70.154 C2.2@123.372,70.133
  Top Layer w0.4: v1(88.285,75.551) 89.449,75.551 C16.1 ; v1(89.261,63.12) 89.281,63.139 89.281,64.452 U6.10@89.314,64.486 ; v1(91.492,63.116) 91.496,63.119 91.496,64.471 U6.12@91.513,64.487 ; v1(94.034,105.975) 94.034,106.871 94.037,106.874 94.037,106.9 94.116,106.979 U5.8 ; v1(94.32,114.402) 95.08,114.402 C11.2@95.082,114.4 ; v1(94.436,88.546) 95.239,89.349 C25.2@95.249,89.349 ; v1(95.128,83.275) 95.163,83.275 95.741,83.853 XTAL1.4 ; v1(95.382,98.648) 95.425,98.648 C21.2@96.003,98.071 ; v1(95.859,87.147) 96.647,87.935 C18.2 ; U6.1@98.096,73.419 v1(98.096,74.901) ; U5.2 101.57,108.249 101.975,107.844 C13.1 ; v1(100.05,79.063) 100.847,79.861 C19.2 ; XTAL1.2 100.905,82.892 102.222,82.892 102.487,82.627 v1(102.541,82.627) ; CL1.2@101.021,86.939 101.021,86.964 101.536,87.479 v1(101.536,87.533) ; D2.C@101.038,102.845 v1(101.74,103.548) ; v1(101.462,77.609) 101.5,77.648 101.5,77.713 102.222,78.435 C26.2 ; R4.1@101.543,100.443 v1(102.3,101.2) GND1.1@102.978,101.878 ; v1(102.184,106.685) 102.184,107.828 C13.1@102.2,107.844 ; v1(102.925,76.227) 103.432,76.734 C27.2@103.432,76.791 ; CL2.2 103.228,84.728 v1(103.8,85.3) ; v1(109.882,69.482) 109.882,68.358 C5.2 ; C6.2@110.6,74.46 C8.2@112.453,74.46 ; C6.2@110.689,74.053 110.689,73.281 110.693,73.277 110.693,72.407 GND.1 ; C22.2@111.459,82.012 v1(112.383,81.087) ; v1(111.879,69.499) 111.879,68.361 C3.2 ; C7.2@112.32,72.66 C8.2@112.32,74.153 ; C20.2 C10.2@114.074,105.855 ; U3.4 U3.3 ; C10.2 113.932,106.007 113.932,106.459 114.504,107.032 v1(114.504,107.056) ; U4.7@114.24,74.89 U4.6 ; D3.C@114.471,118.582 115,119.111 v1(115.044,119.111) ; D4.C 116.33,117.83 v1(116.355,117.83) ; v1(115.763,87.087) 116.245,86.605 C12.2 ; v1(116.636,71.785) 116.674,71.747 116.674,70.566 C4.2@116.8,70.44 ; D5.C@117.176,115.876 v1@117.729,116.429 ; C15.1@119.29,104.067 119.29,103.319 v1(119.306,103.303) ; v1(119.989,79.04) 119.989,78.16 120.309,77.84 C1.1 ; C9.2 121.265,88.713 v1(122.067,87.911) ; U1.6 122.581,73.189 123.69,73.189 v1(123.701,73.177) ; C23.2 122.665,90.091 v1(123.458,89.298) ; C2.2@123.372,70.133 123.401,70.161 v1(124.441,70.161) ; C24.1@123.668,91.587 123.714,91.587 v1(124.453,90.85) ; D1.C 127.168,70.929 127.168,69.846 v1(127.171,69.843) ; SW1.4@128.336,80.471 128.336,79.665 v1(128.342,79.659)
  Top Layer w0.5: v1(87.751,61.091) 88.692,61.091 88.963,60.82 J2.3 ; J2.2 92.184,60.573 92.184,61.172 v1(93.117,61.172)
  other v1: 84,56 94,60 88,64 86,68 90,68 94,68 98,68 110.691,73.279
GNSS_LED: R15.2 U2.2 | length 27.5
  Top Layer w0.254: U2.2 99.867,92.409 100.396,92.938 102.65,92.938 109.208,99.496 109.208,110.808 R15.2
GNSS_RX: GNSS_RX.1 U2.83 U6.2 | length 40
  Top Layer w0.254: GNSS_RX.1 91.992,89.992 ; U6.2 97,75.1 91.992,80.108 91.992,89.992 ; U2.83 105.506,101.248 106.048,100.706 106.048,98.488 101.91,94.35 96.35,94.35 91.992,89.992
GNSS_TX: GNSS_TX.1 U2.80 U6.3 | length 46.2
  Top Layer w0.254: U6.3 95.9,72.349 96.049,72.2 98.8,72.2 99.1,72.5 ; GNSS_TX.1 99.1,72.5 ; U2.80@106.556,102.309 106.556,102.301 107.1,101.757 107.1,98.741 102.118,93.758 96.898,93.758 93.5,90.361 93.5,80.7 99.1,75.1 99.1,72.5
GPIO0: J5.10
GPIO1: J5.09
GPIO2: J5.08
GPIO3: J5.07
GPIO4: J5.06
GPIO5: J5.05
GPIO6: J5.04
GPIO7: J5.03
HB_LED: R13.2 U2.98 | length 4.5
  Top Layer w0.254: R13.2 97.49,99.034 v1(98.347,98.176) ; v1(99.245,97.22) 99.311,97.154 99.311,96.818 U2.98
  Bottom Layer w0.254: v1(98.347,98.176) 98.347,98.147 99.245,97.25 v1(99.245,97.22)
I2C_SCL: J4.03
I2C_SDA: J4.04
IMU_CS: IMU_CS.1 U2.26 U4.12 | length 14.9
  Top Layer w0.254: U2.26 110.123,84.592 110.087,84.592 110.059,84.62 109.849,84.62 109.7,84.471 109.7,82.27 114.512,77.457 v1(115.135,77.457) 115.15,77.457 IMU_CS.1 ; v1(115.113,75.573) 115.18,75.506 115.18,75.219 115.54,74.859 116.041,74.859 U4.12
  Bottom Layer w0.254: v1(115.113,75.573) 115.124,75.583 115.124,77.447 v1(115.135,77.457)
IMU_INT1: U2.33 U4.4 | length 16.3
  Top Layer w0.254: U2.33 112.876,86.752 111.829,87.8 111.357,87.8 109.226,85.669 109.226,81.761 114.324,76.663 114.352,76.663 114.4,76.615 U4.4
IMU_INT2: U2.34 U4.9 | length 29.7
  Top Layer w0.254: v1(112.953,71.034) 112.889,70.969 109.131,70.969 108.818,71.282 108.818,85.929 111.188,88.3 112.036,88.3 113.23,87.106 U2.34 ; U4.9 114.9,73.494 115.183,73.211 v1(115.183,71.824)
  Bottom Layer w0.254: v1(112.953,71.034) v1(115.183,71.824)
MISO: MISO.1 U1.3 U2.31 U3.23 U4.1 | length 28.8
  Top Layer w0.254: U2.31 118.378,79.872 118.378,77.014 v1(118.365,77.001) 118.38,76.986 118.38,75.061 v1(118.394,75.046) ; U4.1 115.9,76.615 116.365,77.08 116.98,77.08 v1(117.046,77.147) ; v1(118.4,73.8) 118.4,72.531 120.244,70.774 ; U3.23 119.75,67.25 120.244,67.744 ; U1.3 120.244,71.988 120.244,70.774 ; 120.26,70.758 120.244,70.774 ; MISO.1@120.696,67.287 120.755,67.142 MISO.1@120.873,66.848 ; MISO.1 120.772,67.519 120.244,67.744 ; 120.244,67.744 120.244,70.774
  Bottom Layer w0.254: v1(117.046,77.147) 118.126,77.147 118.271,77.001 v1(118.365,77.001) ; v1(118.394,75.046) 118.397,75.043 118.397,73.803 v1(118.4,73.8)
MOSI: MOSI.1 U1.2 U2.32 U3.24 U4.14 | length 26.6
  Top Layer w0.254: U2.32@112.559,86.395 119.126,79.829 v1(119.126,75.857) ; U4.14 116.103,75.883 117.034,75.883 v1(117.078,75.927) ; 118.7,69.628 118.7,70.5 v1(119.1,70.9) ; U3.24 118.7,67.75 118.7,69.6 MOSI.1 ; v1(119.1,73.2) U1.2
  Bottom Layer w0.254: v1(117.078,75.927) 117.113,75.892 119.091,75.892 v1(119.126,75.857) 119.113,75.844 119.113,73.213 v1(119.1,73.2) v1(119.1,70.9)
NetC9_1: C9.1 U2.49 | length 2.9
  Top Layer w0.254: U2.49 119.6,91.378 119.6,90.693 120.128,90.165 C9.1@120.135,90.165
NetC10_1: C10.1 U2.73 | length 2.3
  Top Layer w0.254: U2.73@111.145,103.019 112.661,104.535 C10.1@112.835,104.535
NetC11_1: C11.1 R1.1 R2.2 | length 13.9
  Top Layer w0.4: R1.1@92.19,105.077 94.382,105.077 95.82,106.515 95.82,112.414 95.65,112.584 92.271,112.584 R2.2
NetD1_A: D1.A R12.1 | length 1.5
  Top Layer w0.254: R12.1 cw(c127.1,73.995) R12.1@127.165,73.995
  Top Layer w0.4: D1.A R12.1@127.165,73.995
NetD2_A: D2.A R13.1 | length 1.5
  Top Layer w0.254: D2.A@99.765,101.64 D2.A@99.865,101.64
  Top Layer w0.4: R13.1@98.83,100.698 D2.A@99.825,101.693
NetD3_A: D3.A R14.1 | length 1.6
  Top Layer w0.254: R14.1 R14.1@112.165,116.265
  Top Layer w0.4: R14.1@112.165,116.265 D3.A
NetD4_A: D4.A R15.1 | length 1.6
  Top Layer w0.254: D4.A@114.317,115.917 D4.A
  Top Layer w0.4: R15.1 D4.A@114.317,115.917
NetD5_A: D5.A R16.1 | length 1.6
  Top Layer w0.254: D5.A@115.717,114.417 D5.A@115.917,114.417
  Top Layer w0.4: R16.1 D5.A@115.717,114.417
OCP: J6.01
OSC_IN: CL1.1 U2.12 XTAL1.1 | length 7.1
  Top Layer w0.254: CL1.1 CL1.1@99.774,87.865 ; CL1.1@99.6,88.235 102.728,88.235 U2.12
  Top Layer w0.4: XTAL1.1 97.864,86.493 CL1.1
OSC_OUT: CL2.1 U2.13 XTAL1.3 | length 9.7
  Top Layer w0.254: XTAL1.3 XTAL1.3@99.136,81.854 ; CL2.1@101.602,85.465 101.735,85.465 102.785,86.515 102.785,87.585 U2.13
  Top Layer w0.4: XTAL1.3@98.7,81.6 98.7,82.563 CL2.1@101.602,85.465
OUT: U7.1 U8.4 | length 6.2
  Top Layer w0.254: U8.4 95.934,54 96.301,54.367 96.301,57.853 96.039,58.114 95.627,58.114 U7.1@95.589,58.153
OVP: J6.02
RESET: C12.1 J1.10 R3.1 SW1.1 U2.14 | length 51.1
  Top Layer w0.254: U2.14 106.507,90.6 v1(115,90.6) ; v1(117,88.6) C12.1@118.05,87.55 ; R3.1 R3.1@119.503,86.165
  Top Layer w0.4: C12.1@118.05,87.55 R3.1@119.435,86.165 ; R3.1@119.503,86.165 120.168,85.5 127.5,85.5 128.35,86.35 SW1.1 128.342,87.188 128.342,94.745 v1(128.334,94.753) ; J1.10 128.4,107.9 v1(128.4,97)
  Bottom Layer w0.254: v1(115,90.6) v1(117,88.6)
  Bottom Layer w0.4: v1(128.334,94.753) 128.367,94.786 128.367,96.967 v1(128.4,97)
SD_CLK: J3.5 U2.52 | length 16.1
  Top Layer w0.254: v1(116.2,108.5) 116.134,108.434 116.086,108.386 116.086,101.414 119.253,98.247 119.253,96.311 118.569,95.627 U2.52
  Bottom Layer w0.254: v1(116.2,108.5) 116.266,108.434 116.61,108.434 117.144,107.9 J3.5
SD_CS: J3.2 R11.2 U2.51 | length 22.1
  Top Layer w0.254: R11.2 117.605,112.417 118.1,111.921 v1(118.1,111.4) ; v1@118.1,111.387 116.9,110.187 116.9,101.4 119.91,98.39 119.91,96.242 U2.51@118.923,95.254
  Bottom Layer w0.254: v1(118.1,111.4) 118.166,111.334 118.693,111.334 J3.2
SD_MISO: J3.7 R10.2 U2.53 | length 17
  Top Layer w0.254: R10.2 113.835,108.965 v1(115.1,107.7) ; v1@115.108,107.692 115.533,107.267 115.533,100.967 118.703,97.797 118.703,96.468 118.225,95.99 U2.53@118.225,95.945
  Bottom Layer w0.254: v1(115.1,107.7) 115.1,107.074 115.83,106.344 J3.7
SD_MOSI: J3.3 R9.2 U2.54 | length 25.1
  Top Layer w0.254: U2.54 117.862,96.262 117.405,95.805 117.405,95.389 118.368,94.427 118.965,94.427 120.54,96.002 120.54,98.56 117.5,101.6 117.5,109.908 v1(118.031,110.439) 118.064,110.439 119.685,112.06 R9.2
  Bottom Layer w0.254: v1(118.031,110.439) J3.3
SPI_CLK: CLK.1 U1.1 U2.30 U3.26 U4.13 | length 24.3
  Top Layer w0.254: U2.30@111.861,85.691 117.698,79.855 117.698,75.319 ; U4.13 116.081,75.319 117.698,75.319 ; U3.26@117.698,68.69 117.698,74.4 ; U1.1 120.031,74.4 117.698,74.4 ; 117.698,74.4 117.698,75.319
  Top Layer w0.3: CLK.1 116.966,72.96 117.669,72.96
SPI_MISO: J4.05
SPI_MOSI: J4.06
SWDCLK: J1.4 U2.76 | length 44.9
  Top Layer w0.254: U2.76 106.4,105.285 106.4,115 112.2,120.8 119.9,120.8 v1(125.8,114.9) ; J1.4 125.8,107.9 v1(125.8,113.3)
  Bottom Layer w0.254: v1(125.8,113.3) v1(125.8,114.9)
SWDIO: J1.2 U2.72 | length 24.1
  Top Layer w0.254: U2.72 111.498,102.626 111,102.128 111,101.041 118.036,94.005 119.407,94.005 121.571,96.169 121.571,100.771 122.38,101.58 J1.2
SWO: J1.6 U2.89 | length 31.8
  Top Layer w0.254: U2.89 103.37,99.127 104.596,97.9 v1(104.6,97.9) ; v1(107,95.4) 108.803,93.597 119.951,93.597 122.3,95.946 122.3,99.4 123.3,100.4 126.2,100.4 126.881,99.719 126.881,99.259 J1.6
  Bottom Layer w0.254: v1(104.6,97.9) 104.6,97.85 107,95.45 v1(107,95.4)
T1_DRAIN: R5.2 R8.1 U9.3 | length 4.9
  Top Layer w0.254: U9.3 86.928,58.56 87.317,58.171 R8.1 ; R5.2@88.085,54.981 R5.2
  Top Layer w0.3: R8.1 87.317,55.283 87.619,54.981 R5.2@88.085,54.981
T2_DRAIN: R7.2 U9.5 U9.6 | length 1.9
  Top Layer w0.254: R7.2@83.668,57.745 83.698,57.745 83.883,57.559 U9.6 U9.5
USART1_RX: J5.01
USART1_TX: J5.02
USART2_RX: J4.09
USART2_TX: J4.10
V+: R5.1 R6.2 U8.3 | length 3.8
  Top Layer w0.254: R5.1@88.002,54.054 R5.1@88.022,54.034 ; R6.2@89.149,54.034 89.223,54.108 89.331,54 U8.3
  Top Layer w0.3: R5.1@87.982,54.034 R6.2@89.149,54.034
V-: C14.2 L1.1 R8.2 U7.3 U8.2 | length 9.8
  Top Layer w0.254: L1.1 L1.1@90.452,55.964 ; L1.1@90.449,55.969 91.069,55.969 92,56.9 U7.3@95.305,56.9 ; L1.1@90.478,55.946 90.842,55.582 90.842,54.649 90.99,54.5 U8.2@91.566,54.5
  Top Layer w0.3: R8.2@88.125,55.968 C14.2 L1.1@90.449,55.968
VCC_RF: R7.1 U6.14 U9.4 VCC_RF.1 | length 20.5
  Top Layer w0.254: U9.4 83.717,58.56 83.668,58.609 83.67,58.611 83.67,63.37 87.6,67.3 92.352,67.3 93.74,65.912 93.74,64.54 U6.14
  Top Layer w0.3: VCC_RF.1 83.628,59.615
VDD: 3V3.1 C1.2 C2.1 C3.1 C4.1 C5.1 C6.1 C7.1 C8.1 C15.2 C16.2 C18.1 C19.1 C20.1 C21.1 C22.1 C23.1 C24.2 C25.1 C26.1 C27.1 J1.1 J3.4 J6.06 R3.2 R4.2 R9.1 R10.1 R11.1 R12.2 U1.4 U1.8 U2.6 U2.11 U2.19 U2.21 U2.22 U2.28 U2.50 U2.75 U2.94 U2.100 U3.5 U3.31 U4.5 U4.8 U6.7 U6.8 U7.5 U8.1 U8.6 | length 377.3
  Top Layer w0.254: J6.06 J6.06@78.26,71.46 ; U6.8@90.4,72.8 U6.8 ; C16.2 C16.2@91.618,75.262 ; U6.7@91.418,73.58 U6.7@91.5,73.498 ; 94.698,49.439 94.731,49.439 94.829,49.439 ; 94.766,49.525 ccw(c94.766,51.658) 96.898,51.658 96.898,55.598 v1(96.9,55.6) 96.892,55.608 96.892,57.16 cw(c97.232,57.16) 97.232,57.5 U7.5 ; C25.1@96.185,91.115 C25.1 ; C25.1@96.565,91.065 96.819,90.811 97.072,90.811 97.326,91.065 100.65,90.4 U2.6 ; C18.1@97.634,89.694 C18.1 ; C21.1@97.7,96.5 98.4,95.8 98.879,95.8 99.441,95.237 U2.100 ; C18.1@97.965,89.665 98.104,89.525 98.36,89.525 98.635,89.8 102.461,88.687 102.994,89.22 U2.11@103.013,89.22 ; R4.2@100.145,98.812 U2.94 ; C19.1@102.265,81.265 102.434,81.265 104.433,83.264 104.433,84.99 U2.19 ; C26.1 103.783,79.765 C26.1@103.783,79.965 ; C26.1@103.743,80.005 103.743,80.243 105.7,82.2 105.7,84.843 U2.21 ; C27.1@105.015,78.415 106.2,79.6 106.2,84.635 106.902,85.337 106.902,85.366 107.939,86.403 108.356,86.403 v1(108.423,86.469) ; C5.1@109.793,66.567 109.893,66.467 C5.1 ; v1(110.19,85.759) 110.256,85.693 110.436,85.693 U2.28 112.78,83.348 C22.1 ; U2.75@110.437,103.734 110.985,104.282 110.985,105.222 111.335,105.572 C20.1 ; C3.1@112.3,66.1 113,66.1 113.35,65.75 U3.5 ; C8.1@112.815,76.34 112.93,76.225 113.575,76.225 113.912,75.888 114.192,75.888 U4.5 ; C7.1 114.067,72.527 114.067,73.367 114.4,73.7 U4.8 ; C4.1@114.567,70.3 C4.1 ; C4.1@115.19,70.3 115.2,70.29 U3.31 ; R11.1@116.135,111.435 R11.1@116.217,111.435 ; R11.1 R11.1@116.275,111.599 ; U2.50 119.885,91.8 120.707,91.8 120.961,91.546 121.517,91.546 C23.1@121.535,91.565 ; C15.2 C15.2@119.507,106.547
  Top Layer w0.3: 3V3.1@76,58.7 3V3.1 79.117,58.7 cw(c79.117,58.017) 79.6,58.5
  Top Layer w0.4: 79.6,58.5 79.6,57.587 ccw(c81.766,57.587) 79.6,57.583 ccw(c81.766,57.587) 80.234,56.055 81.393,54.897 ccw(c109.003,103.255) 94.698,49.439 ; 82.8,93.127 v1(94.156,93.127) 94.21,93.127 97.597,96.514 C21.1 97.66,96.558 R4.2@99.935,98.834 ; 90.107,72.3 90.4,72.593 U6.8@90.4,72.8 ; U8.1 91.652,55.551 91.801,55.7 94.3,55.7 ; U8.6 94.548,55.452 94.3,55.7 ; 94.829,49.439 ccw(c102.636,88.659) 103.479,48.678 ; v1(95.4,55.7) 94.3,55.7 ; v1(95.688,91.625) 96.185,91.128 C25.1@96.185,91.115 ; C25.1@97.058,90.269 C18.1@97.634,89.694 ; C19.1@102.265,81.265 103.565,79.965 C26.1@103.783,79.965 ; C26.1 105.015,78.415 105.065,78.365 C27.1@105.065,78.265 ; C27.1@105.465,78.225 105.465,77.935 106.047,77.353 v1(106.047,70.347) 105.3,69.6 105.3,50.574 cw(c103.402,50.574) 103.979,48.766 ; v1(109.488,71.921) 109.488,71.976 109.379,72.085 109.379,75.775 109.613,76.009 110.347,76.009 C6.1 ; C5.1@110.193,66.467 109.893,66.467 109.793,66.467 109.562,66.698 108.834,66.698 108.6,66.932 108.6,69.2 v1(109.7,70.3) 113.222,70.3 ; C5.1@110.3,66.36 C3.1@112.3,66.36 ; C6.1@110.6,76.34 C8.1@112.815,76.34 ; C20.1 110.496,106.775 110.496,107.496 115.6,112.6 ; C7.1 113.94,71.018 cw(c113.222,71.018) 113.222,70.3 ; C4.1@114.567,70.3 113.222,70.3 ; R10.1@115.115,110.415 R11.1@116.135,111.435 ; R11.1@116.217,111.594 115.6,112.211 115.6,112.6 ; R3.2 119.171,83.8 128.3,83.8 ; C15.2@119.507,106.547 119.413,106.547 119.3,106.66 v1(119.3,107.6) 119.3,109.2 124.1,114 ; R9.1 119.64,114.2 117.2,114.2 115.6,112.6 ; R9.1@120,114 124.1,114 ; C1.2 120.582,75.878 C1.2@120.6,75.878 ; C1.2@120.6,76.1 C1.2@120.6,75.878 ; C1.2@120.615,75.938 C1.2@120.615,75.878 ; C2.1@121.35,70.2 U1.4 ; U1.8 121.236,74.419 120.6,75.055 C1.2@120.6,75.878 ; C2.1 121.36,68.94 121.8,68.5 129.6,68.5 cw(c129.6,67.3) 130.8,67.3 ; C23.1@121.535,91.565 C24.2@122.763,92.793 ; v1(122.215,75.878) C1.2@120.615,75.878 ; C24.2@122.766,92.833 124.56,94.627 J1.1 124.863,98.737 125.624,98.737 130.8,93.561 ; v1(125.191,75.85) 125.229,75.888 127.088,75.888 127.1,75.9 127.635,75.9 128.636,75.9 cw(c128.6,73.7) 130.8,73.7 ; 129,83.8 cw(c129,82) 130.8,82 ; 103.479,48.678 ccw(c103.402,50.574) 103.979,48.766 ; 103.479,48.678 103.979,48.766 ; 103.979,48.766 115.72,50.836 ccw(c76.194,125.137) 115.776,50.866 ccw(c76.194,125.137) 126.675,57.798 ccw(c120.21,66.186) 130.8,66.141 130.8,67.3 ; C1.2@120.6,75.878 C1.2@120.615,75.878 ; 124.1,114 128.4,114 130.8,111.6 130.8,93.561 ; 130.8,67.3 130.8,73.7 ; 130.8,73.7 130.8,82 ; 130.8,82 130.8,93.561
  Top Layer w0.44: 128.3,83.8 129,83.8
  Top Layer w0.5: U6.7@91.418,73.58 C16.2@91.418,75.262
  Top Layer w0.8: U6.8@90.4,73.498 U6.7@91.5,73.498
  Bottom Layer w0.254: v1(95.4,55.7) 95.45,55.65 96.85,55.65 v1(96.9,55.6) ; v1(108.423,86.469) 109.48,86.469 v1(110.19,85.759) ; J3.4@118.238,108.67 J3.4 ; v1(119.3,107.6) v1@119.3,107.608
  Bottom Layer w0.4: v1(94.156,93.127) 94.171,93.127 95.673,91.625 v1(95.688,91.625) ; v1(106.047,70.347) 106.085,70.309 106.226,70.309 106.235,70.3 v1(109.7,70.3) ; 108.758,70.323 109.399,70.964 v1@109.399,71.9 ; J3.4@118.238,108.67 v1@119.3,107.608 ; v1@122.258,75.889 122.282,75.864 125.177,75.864 v1(125.191,75.85)
pads on no net: J1.7 J1.8 J3. J3.1 J3.8 J3.CD J7.01 J7.02 J7.04 J7.06 J7.07 J7.08 J7.09 J7.10 SW1.2 SW1.3 U1.9 U2.4 U2.5 U2.7 U2.8 U2.9 U2.15 U2.23 U2.24 U2.35 U2.36 U2.37 U2.38 U2.39 U2.40 U2.41 U2.42 U2.43 U2.44 U2.45 U2.46 U2.47 U2.48 U2.55 U2.56 U2.57 U2.58 U2.59 U2.60 U2.61 U2.62 U2.63 U2.64 U2.65 U2.66 U2.67 U2.68 U2.69 U2.70 U2.71 U2.77 U2.78 U2.79 U2.84 U2.85 U2.86 U2.87 U2.88 U2.90 U2.91 U2.92 U2.93 U2.95 U2.96 U2.97 U3.2 U3.7 U3.8 U3.9 U3.10 U3.11 U3.12 U3.13 U3.14 U3.15 U3.16 U3.17 U3.18 U3.19 U3.22 U3.25 U3.27 U3.28 U3.29 U3.30 U3.32 U4.2 U4.3 U4.10 U4.11 U5.5 U6.4 U6.5 U6.6 U6.9 U6.15 U6.18 U8.7

## Polygon pours and split planes (outlines as drawn)
GND on Bottom Layer "GND_L02_P000" (solid, pour order 0): 72.338,60.066 ccw(c102.391,90.118) 132.443,60.066 132.443,120.152 ccw(c102.39,90.1) 72.338,120.152